# EAGLE board CT_schematic (EAGLE 7.6.0)

Size 100 x 80 mm. Coordinates in mm from the lower left corner, seen from the top.
Outline: 0,0 100,0 100,80 0,80 0,0
Copper layers (1*16): Top 0.035mm / dielectric 1.5mm / Bottom 0.035mm
Design rules "default": minimum track width 10mil, minimum drill 24mil, track to track 8mil, track to pad 8mil, pad to pad 8mil, via to via 8mil, smd to smd 8mil, copper to edge 40mil, drill to drill 8mil, minimum pad ring 10mil, minimum via ring 8mil, stop-mask expansion 4mil, vias tented up to drill 0mil, thermal gap 10mil

## Footprints (pad centres in the part's own frame; a part is rotated, then mirrored left to right if it is on the bottom)
C0603 = smd 0.8 x 0.8: 1 -0.762,0; 2 0.762,0
C0402 = smd 0.5 x 0.5: 1 -0.508,0; 2 0.508,0
EXV-9B = smd 2.718 x 1.778: 1 -2.108,0; 2 2.108,0
EXV-9H = smd 3.505 x 1.676: 1 -2.857,0; 2 2.857,0
L0603 = smd 0.8 x 0.8: 1 -0.762,0; 2 0.762,0
PJ-037B_PACKAGE = drill 3.7 square: 1 12,0 | drill 3.2 square: 2 6,0
R0603 = smd 0.8 x 0.8: 1 -0.762,0; 2 0.762,0
LQFP48 = smd 0.3 x 1.2: 1 -2.75,-4.25; 2 -2.25,-4.25; 3 -1.75,-4.25; 4 -1.25,-4.25; 5 -0.75,-4.25; 6 -0.25,-4.25; 7 0.25,-4.25; 8 0.75,-4.25; 9 1.25,-4.25; 10 1.75,-4.25; 11 2.25,-4.25; 12 2.75,-4.25; 25 2.75,4.25; 26 2.25,4.25; 27 1.75,4.25; 28 1.25,4.25; 29 0.75,4.25; 30 0.25,4.25; 31 -0.25,4.25; 32 -0.75,4.25; 33 -1.25,4.25; 34 -1.75,4.25; 35 -2.25,4.25; 36 -2.75,4.25 | smd 1.2 x 0.3: 13 4.25,-2.75; 14 4.25,-2.25; 15 4.25,-1.75; 16 4.25,-1.25; 17 4.25,-0.75; 18 4.25,-0.25; 19 4.25,0.25; 20 4.25,0.75; 21 4.25,1.25; 22 4.25,1.75; 23 4.25,2.25; 24 4.25,2.75; 37 -4.25,2.75; 38 -4.25,2.25; 39 -4.25,1.75; 40 -4.25,1.25; 41 -4.25,0.75; 42 -4.25,0.25; 43 -4.25,-0.25; 44 -4.25,-0.75; 45 -4.25,-1.25; 46 -4.25,-1.75; 47 -4.25,-2.25; 48 -4.25,-2.75
TST-110-05-T-D-RA = drill 1 pad 1.7 square: 1 0,0 | drill 1 pad 1.7: 2 0,2.54; 3 2.54,0; 4 2.54,2.54; 5 5.08,0; 6 5.08,2.54; 7 7.62,0; 8 7.62,2.54; 9 10.16,0; 10 10.16,2.54; 11 12.7,0; 12 12.7,2.54; 13 15.24,0; 14 15.24,2.54; 15 17.78,0; 16 17.78,2.54; 17 20.32,0; 18 20.32,2.54; 19 22.86,0; 20 22.86,2.54
AT24C02D = smd 1.6 x 0.6: 1 -2.475,1.905 | smd 1.55 x 0.6: 2 -2.475,0.635; 3 -2.475,-0.635; 4 -2.475,-1.905; 5 2.475,-1.905; 6 2.475,-0.635; 7 2.475,0.635; 8 2.475,1.905
ABS07-32.768KHZ-7-T = smd 1.1 x 2.4: 1 -2.5,0; 2 0,0
ABLS-25.000MHZ-B2F-T = smd 5.6 x 2.8: 1 -3.81,0; 2 5.69,0
LP2954 = smd 1.6 x 0.6: 1 -2.475,1.905 | smd 1.55 x 0.6: 2 -2.475,0.635; 3 -2.475,-0.635; 4 -2.475,-1.905; 5 2.475,-1.905; 6 2.475,-0.635; 7 2.475,0.635; 8 2.475,1.905
SON-6 = smd 0.55 x 0.3: 1 -0.355,0.5 | smd 0.52 x 0.3: 2 -0.37,0; 3 -0.37,-0.5; 4 0.37,-0.5; 5 0.37,0; 6 0.37,0.5
SW_4-1437565-2 = smd 1.4 x 2.1: 1 -2.23,4.55; 2 -2.23,-4.55; 3 2.23,4.55; 4 2.23,-4.55
LGM67K-G1J2-24-Z = smd 0.8 x 1.4: A -2,0; C 0,0
NC7SZ125M5X = smd 1.3 x 0.7: 1 -1.3,0.95; 2 -1.3,0; 3 -1.3,-0.95; 4 1.3,-0.95; 5 1.3,0.95

## Placement (x,y rotation side)
C1  1e-07  [C0603]  -63.5,54.61 0 top  (outside the outline)
C2  1e-07  [C0603]  -15.24,59.69 0 top  (outside the outline)
C3  1e-07  [C0603]  -19.05,59.69 0 top  (outside the outline)
C4  1e-07  [C0603]  -22.86,59.69 0 top  (outside the outline)
C5  4.7e-06  [C0603]  -59.69,54.61 0 top  (outside the outline)
C6  1e-07  [C0603]  -26.67,59.69 0 top  (outside the outline)
C7  1e-08  [C0603]  -30.48,59.69 0 top  (outside the outline)
C8  1e-06  [C0603]  -34.29,59.69 0 top  (outside the outline)
C9  1e-11  [C0402]  -64.77,59.69 0 top  (outside the outline)
C10  1e-11  [C0402]  -15.24,64.77 0 top  (outside the outline)
C11  1e-11  [C0402]  -19.05,64.77 0 top  (outside the outline)
C12  1e-11  [C0402]  -22.86,64.77 0 top  (outside the outline)
C13  1e-07  [C0402]  -26.67,64.77 0 top  (outside the outline)
C14  1e-07  [C0402]  -30.48,64.77 0 top  (outside the outline)
C15  1e-08  [C0402]  -34.29,64.77 0 top  (outside the outline)
C16  1e-06  [EXV-9B]  -30.48,41.91 0 top  (outside the outline)
C17  2.2e-06  [EXV-9B]  -39.37,41.91 0 top  (outside the outline)
C18  1e-07  [C0402]  -38.1,64.77 0 top  (outside the outline)
C19  0.0001  [EXV-9H]  -54.61,27.94 0 top  (outside the outline)
C20  0.0001  [EXV-9H]  -17.78,35.56 0 top  (outside the outline)
C21  1e-08  [C0402]  -41.91,64.77 0 top  (outside the outline)
C22  1e-08  [C0402]  -45.72,64.77 0 top  (outside the outline)
F1  240.0  [L0603]  -38.1,59.69 0 top  (outside the outline)
J1  PJ-037B  [PJ-037B_PACKAGE]  -27.94,7.62 0 top  (outside the outline)
R1  10000.0  [R0603]  -40.64,49.53 0 top  (outside the outline)
R2  1000.0  [R0603]  -41.91,59.69 0 top  (outside the outline)
R3  1600.5  [R0603]  -45.72,59.69 0 top  (outside the outline)
R4  4700.0  [R0603]  -49.53,59.69 0 top  (outside the outline)
R5  2200.0  [R0603]  -53.34,59.69 0 top  (outside the outline)
R6  2200.0  [R0603]  -57.15,59.69 0 top  (outside the outline)
R7  10000.0  [R0603]  -45.72,49.53 0 top  (outside the outline)
R8  10000.0  [R0603]  -50.8,49.53 0 top  (outside the outline)
R9  10000.0  [R0603]  -55.88,49.53 0 top  (outside the outline)
R10  10000.0  [R0603]  -60.96,49.53 0 top  (outside the outline)
R11  10000.0  [R0603]  -15.24,54.61 0 top  (outside the outline)
R12  10000.0  [R0603]  -20.32,54.61 0 top  (outside the outline)
R13  10000.0  [R0603]  -25.4,54.61 0 top  (outside the outline)
R14  10000.0  [R0603]  -30.48,54.61 0 top  (outside the outline)
R15  10000.0  [R0603]  -35.56,54.61 0 top  (outside the outline)
R16  10000.0  [R0603]  -40.64,54.61 0 top  (outside the outline)
R17  10000.0  [R0603]  -45.72,54.61 0 top  (outside the outline)
R18  100000.0  [R0603]  -15.24,49.53 0 top  (outside the outline)
R19  100000.0  [R0603]  -20.32,49.53 0 top  (outside the outline)
R20  164658.62  [R0603]  -60.96,41.91 0 top  (outside the outline)
R21  100000.0  [R0603]  -25.4,49.53 0 top  (outside the outline)
R22  10000.0  [R0603]  -50.8,54.61 0 top  (outside the outline)
R23  10000.0  [R0603]  -55.88,54.61 0 top  (outside the outline)
R24  9100.0  [R0603]  -60.96,59.69 0 top  (outside the outline)
R25  680000.0  [R0603]  -30.48,49.53 0 top  (outside the outline)
R26  120000.0  [R0603]  -35.56,49.53 0 top  (outside the outline)
U1  STM32L152C6T6A  [LQFP48]  -60.96,5.08 0 top  (outside the outline)
U2  TST-110-05-T-D-RA  [TST-110-05-T-D-RA]  -46.99,25.4 0 top  (outside the outline)
U3  AT24C02D-SSHM-T  [AT24C02D]  -25.4,19.05 0 top  (outside the outline)
U4  ABS07-32.768KHZ-7-T  [ABS07-32.768KHZ-7-T]  -59.69,35.56 0 top  (outside the outline)
U5  ABLS-25.000MHZ-B2F-T  [ABLS-25.000MHZ-B2F-T]  -36.83,35.56 0 top  (outside the outline)
U6  LP2954AIMX/NOPB  [LP2954]  -41.91,19.05 0 top  (outside the outline)
U7  TPS3895ADRYR  [SON-6]  -48.26,63.5 0 top  (outside the outline)
U8  4-1437565-2  [SW_4-1437565-2]  -44.45,6.35 0 top  (outside the outline)
U9  Q65110A2395  [LGM67K-G1J2-24-Z]  -17.78,43.18 0 top  (outside the outline)
U10  nc7sz125m5x  [NC7SZ125M5X]  -46.99,41.91 0 top  (outside the outline)
U11  nc7sz125m5x  [NC7SZ125M5X]  -53.34,41.91 0 top  (outside the outline)

## Library data of the parts
C1-C22 F1 J1 R1-R26 U1-U11 = circuit_tree

## Nets
CLK_CRYSTAL_U1_3: C9.1 U1.3 U4.1
CLK_CRYSTAL_U1_4: C10.1 U1.4 U4.2
CLK_CRYSTAL_U1_5: C11.1 U1.5 U5.1
CLK_CRYSTAL_U1_6: C12.1 U1.6 U5.2
GND: C1.2 C2.2 C3.2 C4.2 C5.2 C6.2 C7.2 C8.2 C9.2 C10.2 C11.2 C12.2 C13.2 C14.2 C15.2 C16.2 C17.2 C18.2 C19.2 C20.2 C21.2 C22.2 J1.2 R2.2 R7.2 R13.2 R14.2 R16.2 R17.2 R21.2 R24.2 R26.2 U1.8 U1.23 U1.35 U1.47 U2.4 U2.6 U2.8 U2.10 U2.12 U2.14 U2.16 U2.18 U2.20 U3.4 U6.4 U7.2 U9.C U10.2 U10.3 U11.1 U11.3
NET_U1_1: C6.1 U1.1
NET_U1_7: R4.1 U1.7 U11.4
NET_U1_9: C7.1 C8.1 F1.1 U1.9
NET_U1_42: R5.1 U1.42 U3.6
NET_U1_43: R6.1 U1.43 U3.5
NET_U1_44: R7.1 U1.44
NET_U1_45: R3.1 U1.45 U9.A
NET_U1_46: R1.1 U1.46 U8.3 U8.4
NET_U2_19: R13.1 U2.19
NET_U3_1: R15.1 U3.1
NET_U3_2: R16.1 U3.2
NET_U3_3: R17.1 U3.3
NET_U3_7: R14.1 U3.7
NET_U6_3: R19.1 U6.3
NET_U6_5: R18.1 U6.5
NET_U6_7: R20.2 R21.1 U6.7
NET_U7_1: R23.1 R24.1 U7.1
NET_U7_3: R25.2 R26.1 U7.3
NET_U7_4: R22.1 U7.4 U10.4 U11.2
NET_U8_1: R2.1 U8.1 U8.2
PROC_SYS_JTCK_SWCLK: R11.1 U1.37 U2.9
PROC_SYS_JTDI: R9.1 U1.38 U2.5
PROC_SYS_JTDO_TRACESWO: U1.39 U2.13
PROC_SYS_JTMS_SWDIO: R10.1 U1.34 U2.7
PROC_SYS_JTRST: R8.1 U1.40 U2.3
RST_OUT_U2_SRESET_B: R12.1 U2.15 U10.1
VCC_S1_16V3: C16.1 C19.1 C20.1 J1.1 R19.2 U6.8
VCC_TIER1_3V3: C1.1 C2.1 C3.1 C4.1 C5.1 C13.1 C14.1 C15.1 C17.1 C18.1 C21.1 C22.1 F1.2 R1.2 R3.2 R4.2 R5.2 R6.2 R8.2 R9.2 R10.2 R11.2 R12.2 R15.2 R18.2 R20.1 R22.2 R23.2 R25.1 U1.24 U1.36 U1.48 U2.1 U2.2 U3.8 U6.1 U7.6 U10.5 U11.5

## Tracks (layer width: path | path; a pad name or v marks a point on that pad's centre or on a via)
CLK_CRYSTAL_U1_3  (2 unrouted)
CLK_CRYSTAL_U1_4  (2 unrouted)
CLK_CRYSTAL_U1_5  (2 unrouted)
CLK_CRYSTAL_U1_6  (2 unrouted)
GND  (52 unrouted)
NET_U1_1  (1 unrouted)
NET_U1_7  (2 unrouted)
NET_U1_9  (3 unrouted)
NET_U1_42  (2 unrouted)
NET_U1_43  (2 unrouted)
NET_U1_44  (1 unrouted)
NET_U1_45  (2 unrouted)
NET_U1_46  (3 unrouted)
NET_U2_19  (1 unrouted)
NET_U3_1  (1 unrouted)
NET_U3_2  (1 unrouted)
NET_U3_3  (1 unrouted)
NET_U3_7  (1 unrouted)
NET_U6_3  (1 unrouted)
NET_U6_5  (1 unrouted)
NET_U6_7  (2 unrouted)
NET_U7_1  (2 unrouted)
NET_U7_3  (2 unrouted)
NET_U7_4  (3 unrouted)
NET_U8_1  (2 unrouted)
PROC_SYS_JTCK_SWCLK  (2 unrouted)
PROC_SYS_JTDI  (2 unrouted)
PROC_SYS_JTDO_TRACESWO  (1 unrouted)
PROC_SYS_JTMS_SWDIO  (2 unrouted)
PROC_SYS_JTRST  (2 unrouted)
RST_OUT_U2_SRESET_B  (2 unrouted)
VCC_S1_16V3  (5 unrouted)
VCC_TIER1_3V3  (38 unrouted)